# Altium PCB 摇杆总图.PcbDoc (part 2 of 2)
Units mil, origin at the board's own origin, x right, y up, seen from the top; angles counter-clockwise.
Board outline 1476.43 x 1476.37 mil, 2 copper layers (Top Layer, Bottom Layer); 8 components, 0 nets, 44 pads, 36 vias.
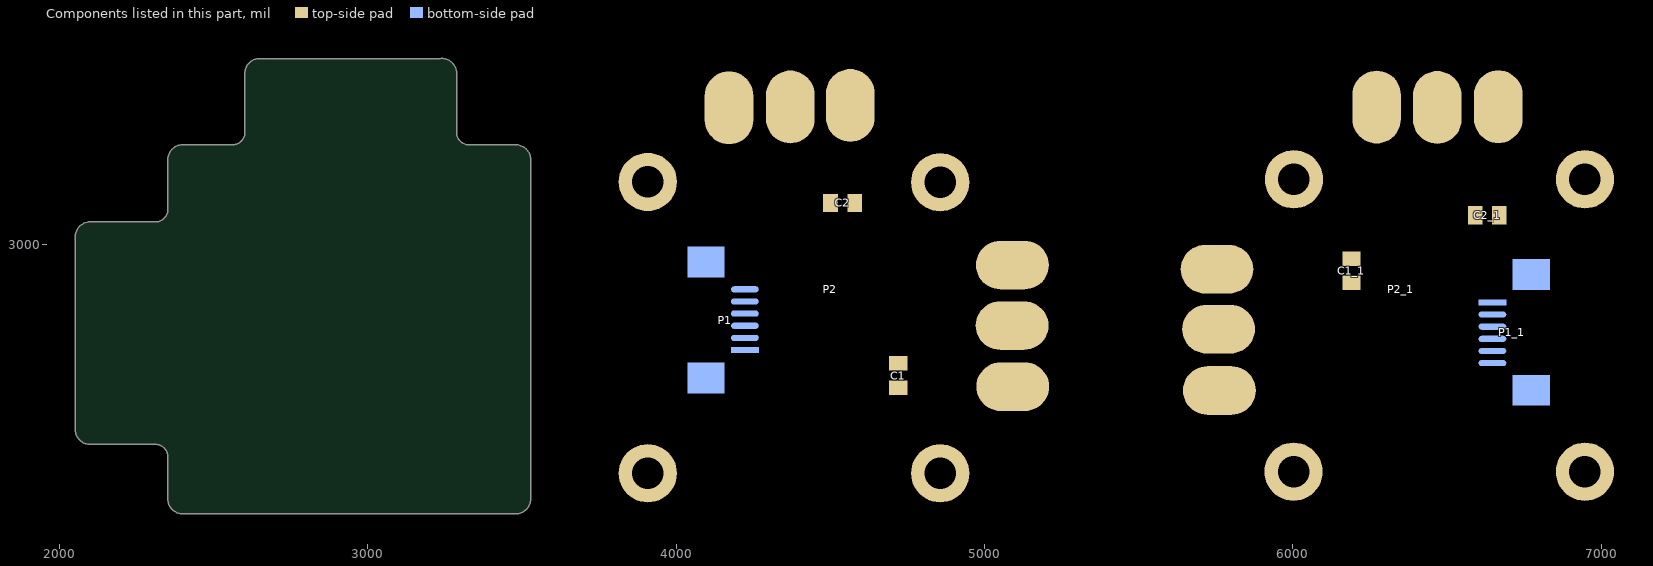
[diagram p2: the components of this part, seen from the top]

## Via types
v1: diameter 30, hole 20, Top Layer to Bottom Layer, 30 vias
v2: diameter 30, hole 20, Top Layer to Bottom Layer, tented both sides, 6 vias

## Nets (pads, with @x,y where several pads share a name; then routed paths per layer and width w, separated by ;. In a path a pad name is that pad's centre, name@x,y a point inside that pad or via, vN(x,y) a via of type N, cw(c..) or ccw(c..) an arc to the next point about the centre after c; other vN are vias at no path point) (continued)
copper on no net: | length 196716.6
  Top Layer w20: v1(4171.56,3146.56) v2(4171.56,3226.56) 4171.56,3443.23 ; 4309.29,3375.1 4405.03,3264.49 ; 4309.5,3374.68 4403.9,3268.74 ; 4309.6,3374.5 4404.85,3267.79 ; 4325.61,3387.34 4405.03,3264.49 ; 4325.7,3387.14 4403.9,3268.74 ; 4325.76,3386.98 4404.85,3267.79 ; 4343.24,3397.14 4404.42,3265.45 ; 4343.32,3396.92 4404.85,3267.79 ; 4343.28,3397.03 4403.9,3268.74 ; 4370.37,3445.98 4405,3411.36 v2(4405,3020) ; 4398.82,3410.7 4404.85,3267.79 ; 4419.01,3409.82 4403.9,3268.74 ; 4419,3409.93 4404.42,3265.45 ; 4418.99,3410.13 4404.85,3267.79 ; 4439.11,3406.19 4403.9,3268.74 ; 4439.11,3406.46 4404.42,3265.45 ; 4439.11,3406.67 4404.85,3267.79 ; 5089.67,2736.93 4631.93,2736.93 v2(4630,2735) ; 5759.02,2725.37 5829.39,2655 v2(6305,2655) 6230,2655 ; 5781.93,2658.63 5935.45,2656.18 ; 5782.02,2658.61 5939.45,2655.41 ; 5782.27,2658.55 5933.37,2657.47 ; 5782.82,2658.42 5937.6,2657.72 ; 5782.9,2658.4 5933.84,2658.78 ; 5783.03,2658.37 5933.65,2659.12 ; 5783.25,2658.32 5933.76,2659.58 ; 5783.6,2678.93 5935.45,2656.18 ; 5783.75,2678.88 5939.45,2655.41 ; 5783.79,2678.87 5933.37,2657.47 ; 5784.46,2678.67 5933.76,2659.58 ; 5785.84,2657.79 5942.04,2663.75 ; 5786.24,2657.72 5937.2,2665.53 ; 5786.39,2678.13 5942.04,2663.75 ; 5786.56,2678.09 5937.2,2665.53 ; 5786.68,2657.64 5934.41,2666.98 ; 5786.8,2678.03 5934.41,2666.98 ; 5787.15,2677.95 5934.62,2668.04 ; 5787.19,2657.55 5934.62,2668.04 ; 5787.39,2657.52 5942.22,2667.24 ; 5787.39,2677.89 5937.52,2668.13 ; 5787.44,2657.51 5937.52,2668.13 ; 5787.45,2677.88 5942.22,2667.24 ; 5787.6,2677.84 5937.5,2668.82 ; 5787.72,2677.82 5934.93,2669.77 ; 5787.74,2677.81 5934.89,2669.83 ; 5787.89,2698.62 5935.45,2656.18 ; 5787.97,2698.59 5933.37,2657.47 ; 5788.02,2657.42 5934.93,2669.77 ; 5788.02,2698.57 5939.45,2655.41 ; 5788.04,2657.42 5934.89,2669.83 ; 5788.22,2698.49 5933.84,2658.78 ; 5788.24,2677.7 5935.19,2671.34 ; 5788.26,2698.48 5933.65,2659.12 ; 5788.37,2677.67 5943.85,2669.92 ; 5788.35,2698.44 5933.76,2659.58 ; 5788.44,2657.36 5938.55,2670.13 ; 5788.48,2677.65 5935.11,2672.09 ; 5788.6,2657.33 5934.9,2671.02 ; 5788.65,2677.62 5945.22,2670.57 ; 5788.69,2657.32 5943.85,2669.92 ; 5788.77,2657.31 5935.19,2671.34 ; 5788.76,2677.59 5939.39,2672.11 ; 5788.85,2677.58 5940.13,2672.24 ; 5789.06,2657.27 5945.22,2670.57 ; 5789.12,2657.26 5935.11,2672.09 ; 5789.4,2657.22 5939.39,2672.11 ; 5789.5,2657.21 5940.13,2672.24 ; 5789.57,2698.02 5937.2,2665.53 ; 5789.53,2698.03 5942.04,2663.75 ; 5789.87,2697.93 5934.62,2668.04 ; 5790.04,2697.87 5937.52,2668.13 ; 5790.2,2697.82 5934.89,2669.83 ; 5790.19,2697.83 5934.93,2669.77 ; 5790.49,2697.74 5935.19,2671.34 ; 5790.62,2697.7 5935.11,2672.09 ; 5790.67,2697.69 5943.85,2669.92 ; 5790.9,2697.63 5940.13,2672.24 ; 5810.86,2751.27 5945.22,2670.57 ; 5810.98,2751.21 5940.13,2672.24 ; 5811.03,2751.18 5950.78,2666.72 ; 5811.39,2751 5935.11,2672.09 ; 5811.43,2750.99 5938.55,2670.13 ; 5811.5,2750.95 5935.19,2671.34 ; 5811.71,2750.84 5937.5,2668.82 ; 5812.06,2750.65 5934.62,2668.04 ; 5812.1,2750.63 5942.04,2663.75 ; 5822.32,2767.83 5945.22,2670.57 ; 5822.48,2767.74 5950.78,2666.72 ; 5822.62,2767.66 5940.13,2672.24 ; 5822.66,2767.64 5943.85,2669.92 ; 5823.36,2767.23 5938.55,2670.13 ; 5823.52,2767.13 5942.22,2667.24 ; 5823.68,2767.04 5934.9,2671.02 ; 5823.83,2766.95 5937.5,2668.82 ; 5823.97,2766.86 5934.89,2669.83 ; 5824.35,2766.62 5942.04,2663.75 ; 5824.44,2766.57 5934.62,2668.04 ; 5824.65,2766.44 5937.2,2665.53 ; 5824.73,2766.38 5934.62,2666.8 ; 5826.43,2765.24 5935.81,2658.51 ; 5826.51,2765.18 5933.76,2659.58 ; 5826.54,2765.16 5939.45,2655.41 ; 5826.67,2765.07 5933.84,2658.78 ; 5826.63,2765.1 5933.65,2659.12 ; 5826.98,2764.85 5935.45,2656.18 ; 5827.03,2764.81 5933.37,2657.47 ; 5835.96,2782.94 5945.22,2670.57 ; 5836.03,2782.89 5950.78,2666.72 ; 5836.45,2782.62 5943.85,2669.92 ; 5836.5,2782.58 5940.13,2672.24 ; 5836.7,2782.45 5939.39,2672.11 ; 5837.52,2781.89 5938.55,2670.13 ; 5837.62,2781.82 5942.22,2667.24 ; 5837.65,2781.79 5935.11,2672.09 ; 5837.88,2781.64 5935.19,2671.34 ; 5838.05,2781.52 5934.9,2671.02 ; 5838.16,2781.44 5937.5,2668.82 ; 5838.37,2781.29 5937.52,2668.13 ; 5838.71,2781.04 5942.04,2663.75 ; 5839.05,2780.8 5934.62,2668.04 ; 5839.24,2780.66 5937.2,2665.53 ; 5841.41,2778.98 5937.6,2657.72 ; 5841.59,2778.84 5935.81,2658.51 ; 5841.63,2778.8 5939.45,2655.41 ; 5841.76,2778.7 5933.76,2659.58 ; 5841.91,2778.58 5933.65,2659.12 ; 5841.96,2778.54 5933.84,2658.78 ; 5842.32,2778.24 5935.45,2656.18 ; 5842.44,2778.14 5933.37,2657.47 ; v2(6468.07,2943.07) 6468.07,3444.67 ; 4104.96,3386.83 4171.56,3265.12 ; 4104.96,3386.83 4171.56,3265.12 ; 4104.96,3386.83 4171.56,3265.12 ; 4104.96,3386.83 4171.56,3265.12 ; 4104.96,3386.83 4171.56,3265.12 ; 4104.96,3386.83 4171.56,3265.12 ; 4104.96,3386.83 4171.56,3265.12 ; 4104.96,3386.83 4171.56,3265.12 ; 4104.96,3386.83 4171.56,3265.12 ; 4123.57,3395.3 4171.56,3265.12 ; 4123.57,3395.3 4171.56,3265.12 ; 4123.57,3395.3 4171.56,3265.12 ; 4123.57,3395.3 4171.56,3265.12 ; 4123.57,3395.3 4171.56,3265.12 ; 4123.57,3395.3 4171.56,3265.12 ; 4123.57,3395.3 4171.56,3265.12 ; 4123.57,3395.3 4171.56,3265.12 ; 4123.57,3395.3 4171.56,3265.12 ; 4142.97,3400.88 4171.56,3265.12 ; 4142.97,3400.88 4171.56,3265.12 ; 4142.97,3400.88 4171.56,3265.12 ; 4142.97,3400.88 4171.56,3265.12 ; 4142.97,3400.88 4171.56,3265.12 ; 4142.97,3400.88 4171.56,3265.12 ; 4142.97,3400.88 4171.56,3265.12 ; 4142.97,3400.88 4171.56,3265.12 ; 4142.97,3400.88 4171.56,3265.12 ; 4171.56,3265.12 4171.56,3403.86 ; 4171.56,3265.12 4200.14,3400.88 ; 4171.56,3265.12 4219.54,3395.3 ; 4171.56,3265.12 4238.15,3386.83 ; 4171.56,3265.12 4238.15,3386.83 ; 4171.56,3265.12 4219.54,3395.3 ; 4171.56,3265.12 4200.14,3400.88 ; 4171.56,3265.12 4171.56,3403.86 ; 4171.56,3265.12 4238.15,3386.83 ; 4171.56,3265.12 4219.54,3395.3 ; 4171.56,3265.12 4200.14,3400.88 ; 4171.56,3265.12 4171.56,3403.86 ; 4171.56,3265.12 4238.15,3386.83 ; 4171.56,3265.12 4219.54,3395.3 ; 4171.56,3265.12 4200.14,3400.88 ; 4171.56,3265.12 4171.56,3403.86 ; 4171.56,3265.12 4238.15,3386.83 ; 4171.56,3265.12 4219.54,3395.3 ; 4171.56,3265.12 4200.14,3400.88 ; 4171.56,3265.12 4171.56,3403.86 ; 4171.56,3265.12 4238.15,3386.83 ; 4171.56,3265.12 4219.54,3395.3 ; 4171.56,3265.12 4200.14,3400.88 ; 4171.56,3265.12 4171.56,3403.86 ; 4171.56,3265.12 4238.15,3386.83 ; 4171.56,3265.12 4219.54,3395.3 ; 4171.56,3265.12 4200.14,3400.88 ; 4171.56,3265.12 4171.56,3403.86 ; 4171.56,3265.12 4238.15,3386.83 ; 4171.56,3265.12 4219.54,3395.3 ; 4171.56,3265.12 4200.14,3400.88 ; 4171.56,3265.12 4171.56,3403.86 ; 4171.56,3265.12 4238.15,3386.83 ; 4171.56,3265.12 4219.54,3395.3 ; 4171.56,3265.12 4200.14,3400.88 ; 4171.56,3265.12 4171.56,3403.86 ; 4309.25,3375.16 4405,3264.2 ; 4309.25,3375.16 4405,3264.2 ; 4309.25,3375.16 4405,3264.2 ; 4309.26,3375.14 4404.42,3265.45 ; 4309.25,3375.16 4405,3264.2 ; 4309.25,3375.16 4405,3264.2 ; 4325.59,3387.38 4405,3264.2 ; 4325.59,3387.38 4405,3264.2 ; 4325.59,3387.38 4405,3264.2 ; 4325.58,3387.4 4404.42,3265.45 ; 4325.59,3387.38 4405,3264.2 ; 4325.59,3387.38 4405,3264.2 ; 4343.25,3397.12 4405,3264.2 ; 4343.25,3397.12 4405,3264.2 ; 4343.26,3397.1 4405.03,3264.49 ; 4343.25,3397.12 4405,3264.2 ; 4343.25,3397.12 4405,3264.2 ; 4343.25,3397.12 4405,3264.2 ; 4370.37,3406.61 4405,3264.2 ; 4370.37,3406.61 4403.9,3268.74 ; 4370.37,3406.61 4404.85,3267.79 ; 4370.37,3406.61 4405,3264.2 ; 4370.37,3406.61 4405.03,3264.49 ; 4370.37,3406.61 4405,3264.2 ; 4370.37,3406.61 4404.42,3265.45 ; 4370.37,3406.61 4405,3264.2 ; 4370.37,3406.61 4405,3264.2 ; 4398.83,3410.63 4405,3264.2 ; 4398.83,3410.63 4405,3264.2 ; 4398.83,3410.65 4405.03,3264.49 ; 4398.83,3410.63 4405,3264.2 ; 4398.83,3410.63 4405,3264.2 ; 4398.83,3410.63 4405,3264.2 ; 4403.9,3268.74 4398.84,3410.54 4404.42,3265.45 ; 4405,3264.2 4418.99,3410.09 ; 4405,3264.2 4439.11,3406.74 ; 4405,3264.2 4439.11,3406.74 ; 4405,3264.2 4418.99,3410.09 ; 4405,3264.2 4439.11,3406.74 ; 4405,3264.2 4418.99,3410.09 ; 4405,3264.2 4439.11,3406.74 ; 4405,3264.2 4418.99,3410.09 ; 4405,3264.2 4439.11,3406.74 ; 4405,3264.2 4418.99,3410.09 ; 4405.03,3264.49 4439.11,3406.75 ; 4405.03,3264.49 4418.99,3410.11 ; v2(4630,2735) 4705.13,2736.93 v2(4630,2735) ; 4911.56,2736.93 5050.3,2736.93 ; 4911.56,2736.93 5047.32,2765.51 ; 4911.56,2736.93 5047.32,2708.34 ; 4911.56,2736.93 5041.73,2784.91 ; 4911.56,2736.93 5041.73,2688.95 ; 4911.56,2736.93 5033.27,2803.53 ; 4911.56,2736.93 5033.27,2670.33 ; 4911.56,2736.93 5033.27,2670.33 ; 4911.56,2736.93 5033.27,2803.53 ; 4911.56,2736.93 5041.73,2688.95 ; 4911.56,2736.93 5041.73,2784.91 ; 4911.56,2736.93 5047.32,2708.34 ; 4911.56,2736.93 5047.32,2765.51 ; 4911.56,2736.93 5050.3,2736.93 ; 4911.56,2736.93 5033.27,2670.33 ; 4911.56,2736.93 5033.27,2803.53 ; 4911.56,2736.93 5041.73,2688.95 ; 4911.56,2736.93 5041.73,2784.91 ; 4911.56,2736.93 5047.32,2708.34 ; 4911.56,2736.93 5047.32,2765.51 ; 4911.56,2736.93 5050.3,2736.93 ; 4911.56,2736.93 5033.27,2670.33 ; 4911.56,2736.93 5033.27,2803.53 ; 4911.56,2736.93 5041.73,2688.95 ; 4911.56,2736.93 5041.73,2784.91 ; 4911.56,2736.93 5047.32,2708.34 ; 4911.56,2736.93 5047.32,2765.51 ; 4911.56,2736.93 5050.3,2736.93 ; 4911.56,2736.93 5033.27,2670.33 ; 4911.56,2736.93 5033.27,2803.53 ; 4911.56,2736.93 5041.73,2688.95 ; 4911.56,2736.93 5041.73,2784.91 ; 4911.56,2736.93 5047.32,2708.34 ; 4911.56,2736.93 5047.32,2765.51 ; 4911.56,2736.93 5050.3,2736.93 ; 4911.56,2736.93 5033.27,2670.33 ; 4911.56,2736.93 5033.27,2803.53 ; 4911.56,2736.93 5041.73,2688.95 ; 4911.56,2736.93 5041.73,2784.91 ; 4911.56,2736.93 5047.32,2708.34 ; 4911.56,2736.93 5047.32,2765.51 ; 4911.56,2736.93 5050.3,2736.93 ; 4911.56,2736.93 5033.27,2670.33 ; 4911.56,2736.93 5033.27,2803.53 ; 4911.56,2736.93 5041.73,2688.95 ; 4911.56,2736.93 5041.73,2784.91 ; 4911.56,2736.93 5047.32,2708.34 ; 4911.56,2736.93 5047.32,2765.51 ; 4911.56,2736.93 5050.3,2736.93 ; 4911.56,2736.93 5033.27,2670.33 ; 4911.56,2736.93 5033.27,2803.53 ; 4911.56,2736.93 5041.73,2688.95 ; 4911.56,2736.93 5041.73,2784.91 ; 4911.56,2736.93 5047.32,2708.34 ; 4911.56,2736.93 5047.32,2765.51 ; 4911.56,2736.93 5050.3,2736.93 ; 4911.56,2736.93 5033.27,2670.33 ; 4911.56,2736.93 5033.27,2803.53 ; 4911.56,2736.93 5041.73,2688.95 ; 4911.56,2736.93 5041.73,2784.91 ; 4911.56,2736.93 5047.32,2708.34 ; 4911.56,2736.93 5047.32,2765.51 ; 4911.56,2736.93 5050.3,2736.93 ; 5782.14,2658.58 5940.75,2655.38 ; 5782.14,2658.58 5940.75,2655.38 ; 5782.14,2658.58 5940.75,2655.38 ; 5782.14,2658.58 5940.75,2655.38 ; 5782.14,2658.58 5940.75,2655.38 ; 5782.99,2658.38 5936.02,2658.48 ; 5782.99,2658.38 5936.02,2658.48 ; 5782.99,2658.38 5936.02,2658.48 ; 5782.99,2658.38 5936.02,2658.48 ; 5782.98,2658.38 5935.81,2658.51 ; 5782.99,2658.38 5936.02,2658.48 ; 5782.99,2658.38 5936.02,2658.48 ; 5782.99,2658.38 5936.02,2658.48 ; 5783.86,2678.85 5940.75,2655.38 ; 5783.86,2678.85 5940.75,2655.38 ; 5783.86,2678.85 5940.75,2655.38 ; 5783.86,2678.85 5940.75,2655.38 ; 5783.86,2678.85 5940.75,2655.38 ; 5783.95,2658.17 5962.33,2655 ; 5783.95,2658.17 5962.33,2655 ; 5783.95,2658.17 5962.33,2655 ; 5784.33,2678.7 5936.02,2658.48 ; 5784.33,2678.7 5936.02,2658.48 ; 5784.33,2678.7 5936.02,2658.48 ; 5784.33,2678.7 5936.02,2658.48 ; 5784.33,2678.7 5936.02,2658.48 ; 5784.33,2678.7 5936.02,2658.48 ; 5784.33,2678.7 5936.02,2658.48 ; 5784.39,2658.07 5933.76,2662.12 ; 5784.39,2658.07 5933.76,2662.12 ; 5784.39,2658.07 5933.76,2662.12 ; 5784.39,2658.07 5933.76,2662.12 ; 5784.39,2658.07 5933.76,2662.12 ; 5784.39,2658.07 5933.76,2662.12 ; 5784.39,2658.07 5933.76,2662.12 ; 5784.39,2658.07 5933.76,2662.12 ; 5784.39,2658.07 5933.76,2662.12 ; 5784.39,2658.07 5933.76,2662.12 ; 5785.23,2678.44 5933.76,2662.12 ; 5785.23,2678.44 5933.76,2662.12 ; 5785.23,2678.44 5933.76,2662.12 ; 5785.23,2678.44 5933.76,2662.12 ; 5785.23,2678.44 5933.76,2662.12 ; 5785.23,2678.44 5933.76,2662.12 ; 5785.23,2678.44 5933.76,2662.12 ; 5785.23,2678.44 5933.76,2662.12 ; 5785.23,2678.44 5933.76,2662.12 ; 5785.23,2678.44 5933.76,2662.12 ; 5785.46,2678.38 5962.33,2655 ; 5785.46,2678.38 5962.33,2655 ; 5785.46,2678.38 5962.33,2655 ; 5786.6,2657.65 5935.05,2666.71 ; 5786.6,2657.65 5935.05,2666.71 ; 5786.6,2657.65 5935.05,2666.71 ; 5786.6,2657.65 5935.05,2666.71 ; 5786.6,2657.65 5935.05,2666.71 ; 5786.6,2657.65 5935.05,2666.71 ; 5786.6,2657.65 5935.05,2666.71 ; 5786.61,2657.65 5934.62,2666.8 ; 5786.6,2657.65 5935.05,2666.71 ; 5786.76,2678.04 5935.05,2666.71 ; 5786.76,2678.04 5935.05,2666.71 ; 5786.76,2678.04 5935.05,2666.71 ; 5786.76,2678.04 5935.05,2666.71 ; 5786.76,2678.04 5935.05,2666.71 ; 5786.76,2678.04 5935.05,2666.71 ; 5786.76,2678.04 5935.05,2666.71 ; 5786.76,2678.04 5934.62,2666.8 ; 5786.76,2678.04 5935.05,2666.71 ; 5786.87,2657.61 5953.28,2664.2 ; 5786.87,2657.61 5953.28,2664.2 ; 5786.87,2657.61 5953.28,2664.2 ; 5787.31,2677.91 5953.28,2664.2 ; 5787.31,2677.91 5953.28,2664.2 ; 5787.31,2677.91 5953.28,2664.2 ; 5787.78,2677.8 5940.94,2668.61 ; 5787.78,2677.8 5940.94,2668.61 ; 5787.78,2677.8 5940.94,2668.61 ; 5787.78,2677.8 5940.94,2668.61 ; 5787.78,2677.8 5940.94,2668.61 ; 5787.78,2677.8 5940.94,2668.61 ; 5787.83,2657.45 5946.82,2667.53 ; 5787.83,2657.45 5946.82,2667.53 ; 5787.83,2657.45 5946.82,2667.53 ; 5787.83,2657.45 5946.82,2667.53 ; 5787.84,2677.79 5946.82,2667.53 ; 5787.84,2677.79 5946.82,2667.53 ; 5787.86,2677.78 5950.78,2666.72 ; 5787.84,2677.79 5946.82,2667.53 ; 5787.84,2677.79 5946.82,2667.53 ; 5787.91,2657.44 5940.94,2668.61 ; 5787.91,2657.44 5940.94,2668.61 ; 5787.91,2657.44 5940.94,2668.61 ; 5787.91,2657.44 5940.94,2668.61 ; 5787.91,2657.44 5940.94,2668.61 ; 5787.91,2657.44 5940.94,2668.61 ; 5788.09,2698.54 5940.75,2655.38 ; 5788.09,2698.54 5940.75,2655.38 ; 5788.09,2698.54 5940.75,2655.38 ; 5788.09,2698.54 5940.75,2655.38 ; 5788.09,2698.54 5940.75,2655.38 ; 5788.28,2698.47 5937.6,2657.72 ; 5788.31,2698.46 5936.02,2658.48 ; 5788.31,2698.46 5936.02,2658.48 ; 5788.31,2698.46 5936.02,2658.48 ; 5788.31,2698.46 5936.02,2658.48 ; 5788.3,2698.46 5935.81,2658.51 ; 5788.31,2698.46 5936.02,2658.48 ; 5788.31,2698.46 5936.02,2658.48 ; 5788.31,2698.46 5936.02,2658.48 ; 5788.78,2698.29 5933.76,2662.12 ; 5788.78,2698.29 5933.76,2662.12 ; 5788.78,2698.29 5933.76,2662.12 ; 5788.78,2698.29 5933.76,2662.12 ; 5788.78,2698.29 5933.76,2662.12 ; 5788.78,2698.29 5933.76,2662.12 ; 5788.78,2698.29 5933.76,2662.12 ; 5788.78,2698.29 5933.76,2662.12 ; 5788.78,2698.29 5933.76,2662.12 ; 5788.78,2698.29 5933.76,2662.12 ; 5789.21,2698.14 5962.33,2655 ; 5789.21,2698.14 5962.33,2655 ; 5789.21,2698.14 5962.33,2655 ; 5789.65,2697.99 5935.05,2666.71 ; 5789.65,2697.99 5935.05,2666.71 ; 5789.65,2697.99 5935.05,2666.71 ; 5789.65,2697.99 5935.05,2666.71 ; 5789.67,2697.99 5934.41,2666.98 ; 5789.65,2697.99 5935.05,2666.71 ; 5789.65,2697.99 5935.05,2666.71 ; 5789.65,2697.99 5935.05,2666.71 ; 5789.65,2697.99 5934.62,2666.8 ; 5789.65,2697.99 5935.05,2666.71 ; 5790.17,2697.83 5953.28,2664.2 ; 5790.17,2697.83 5953.28,2664.2 ; 5790.16,2697.84 5937.5,2668.82 ; 5790.13,2697.85 5942.22,2667.24 ; 5790.17,2697.83 5953.28,2664.2 ; 5790.3,2697.79 5940.94,2668.61 ; 5790.3,2697.79 5940.94,2668.61 ; 5790.3,2697.79 5940.94,2668.61 ; 5790.3,2697.79 5940.94,2668.61 ; 5790.3,2697.79 5940.94,2668.61 ; 5790.3,2697.79 5940.94,2668.61 ; 5790.41,2697.76 5946.82,2667.53 ; 5790.42,2697.76 5934.9,2671.02 ; 5790.41,2697.76 5946.82,2667.53 ; 5790.41,2697.76 5946.82,2667.53 ; 5790.41,2697.76 5946.82,2667.53 ; 5798.39,2725.37 5962.33,2655 ; 5798.39,2725.37 5935.05,2666.71 ; 5798.39,2725.37 5940.94,2668.61 ; 5798.39,2725.37 5946.82,2667.53 ; 5798.39,2725.37 5953.28,2664.2 ; 5798.39,2725.37 5940.75,2655.38 ; 5798.39,2725.37 5940.75,2655.38 ; 5798.39,2725.37 5937.6,2657.72 ; 5798.39,2725.37 5933.84,2658.78 ; 5798.39,2725.37 5933.76,2662.12 ; 5798.39,2725.37 5933.76,2662.12 ; 5798.39,2725.37 5933.76,2662.12 ; 5798.39,2725.37 5933.76,2662.12 ; 5798.39,2725.37 5936.02,2658.48 ; 5798.39,2725.37 5936.02,2658.48 ; 5798.39,2725.37 5936.02,2658.48 ; 5798.39,2725.37 5933.76,2659.58 ; 5798.39,2725.37 5935.05,2666.71 ; 5798.39,2725.37 5935.05,2666.71 ; 5798.39,2725.37 5935.05,2666.71 ; 5798.39,2725.37 5934.41,2666.98 ; 5798.39,2725.37 5940.94,2668.61 ; 5798.39,2725.37 5940.94,2668.61 ; 5798.39,2725.37 5938.55,2670.13 ; 5798.39,2725.37 5934.9,2671.02 ; 5798.39,2725.37 5946.82,2667.53 ; 5798.39,2725.37 5943.85,2669.92 ; 5798.39,2725.37 5939.39,2672.11 ; 5798.39,2725.37 5935.11,2672.09 ; 5798.39,2725.37 5950.78,2666.72 ; 5798.39,2725.37 5945.22,2670.57 ; 5798.39,2725.37 5940.13,2672.24 ; 5798.39,2725.37 5935.19,2671.34 ; 5798.39,2725.37 5953.28,2664.2 ; 5798.39,2725.37 5946.82,2667.53 ; 5798.39,2725.37 5940.94,2668.61 ; 5798.39,2725.37 5935.05,2666.71 ; 5798.39,2725.37 5933.76,2662.12 ; 5798.39,2725.37 5936.02,2658.48 ; 5798.39,2725.37 5935.45,2656.18 ; 5798.39,2725.37 5933.37,2657.47 ; 5798.39,2725.37 5933.76,2662.12 ; 5798.39,2725.37 5933.76,2662.12 ; 5798.39,2725.37 5935.81,2658.51 ; 5798.39,2725.37 5933.65,2659.12 ; 5798.39,2725.37 5935.05,2666.71 ; 5798.39,2725.37 5935.05,2666.71 ; 5798.39,2725.37 5934.62,2666.8 ; 5798.39,2725.37 5940.94,2668.61 ; 5798.39,2725.37 5937.5,2668.82 ; 5798.39,2725.37 5934.93,2669.77 ; 5798.39,2725.37 5942.22,2667.24 ; 5798.39,2725.37 5937.52,2668.13 ; 5798.39,2725.37 5934.89,2669.83 ; 5798.39,2725.37 5937.2,2665.53 ; 5798.39,2725.37 5934.62,2668.04 ; 5798.39,2725.37 5936.02,2658.48 ; 5798.39,2725.37 5933.76,2662.12 ; 5798.39,2725.37 5940.75,2655.38 ; 5798.39,2725.37 5939.45,2655.41 ; 5798.39,2725.37 5933.76,2662.12 ; 5798.39,2725.37 5936.02,2658.48 ; 5798.39,2725.37 5942.04,2663.75 ; 5798.39,2725.37 5940.75,2655.38 ; 5798.39,2725.37 5962.33,2655 ; 5798.39,2725.37 5940.75,2655.38 ; 5798.39,2725.37 5933.76,2662.12 ; 5798.39,2725.37 5936.02,2658.48 ; 5798.39,2725.37 5935.05,2666.71 ; 5798.39,2725.37 5940.94,2668.61 ; 5798.39,2725.37 5946.82,2667.53 ; 5798.39,2725.37 5953.28,2664.2 ; 5798.39,2725.37 5962.33,2655 ; 5811.19,2751.1 5946.82,2667.53 ; 5811.21,2751.09 5953.28,2664.2 ; 5811.19,2751.1 5946.82,2667.53 ; 5811.21,2751.09 5953.28,2664.2 ; 5811.19,2751.1 5946.82,2667.53 ; 5811.19,2751.1 5946.82,2667.53 ; 5811.21,2751.09 5953.28,2664.2 ; 5811.47,2750.96 5940.94,2668.61 ; 5811.47,2750.96 5940.94,2668.61 ; 5811.47,2750.96 5940.94,2668.61 ; 5811.47,2750.96 5940.94,2668.61 ; 5811.47,2750.96 5940.94,2668.61 ; 5811.47,2750.96 5940.94,2668.61 ; 5811.81,2750.78 5962.33,2655 ; 5811.81,2750.79 5937.52,2668.13 ; 5811.81,2750.78 5962.33,2655 ; 5811.81,2750.78 5962.33,2655 ; 5812.22,2750.56 5935.05,2666.71 ; 5812.22,2750.56 5935.05,2666.71 ; 5812.22,2750.56 5935.05,2666.71 ; 5812.22,2750.56 5935.05,2666.71 ; 5812.22,2750.56 5935.05,2666.71 ; 5812.22,2750.56 5935.05,2666.71 ; 5812.22,2750.56 5935.05,2666.71 ; 5812.22,2750.56 5937.2,2665.53 ; 5812.22,2750.56 5935.05,2666.71 ; 5813,2750.12 5933.76,2662.12 ; 5813,2750.12 5933.76,2662.12 ; 5813,2750.12 5933.76,2662.12 ; 5813,2750.12 5933.76,2662.12 ; 5813,2750.12 5933.76,2662.12 ; 5813,2750.12 5933.76,2662.12 ; 5813,2750.12 5933.76,2662.12 ; 5813,2750.12 5933.76,2662.12 ; 5813,2750.12 5933.76,2662.12 ; 5813,2750.12 5933.76,2662.12 ; 5813.29,2749.95 5937.6,2657.72 ; 5813.32,2749.93 5936.02,2658.48 ; 5813.32,2749.93 5936.02,2658.48 ; 5813.32,2749.93 5936.02,2658.48 ; 5813.32,2749.93 5936.02,2658.48 ; 5813.32,2749.93 5936.02,2658.48 ; 5813.32,2749.93 5936.02,2658.48 ; 5813.32,2749.93 5936.02,2658.48 ; 5813.35,2749.91 5940.75,2655.38 ; 5813.35,2749.91 5940.75,2655.38 ; 5813.36,2749.91 5933.76,2659.58 ; 5813.34,2749.92 5935.81,2658.51 ; 5813.35,2749.91 5940.75,2655.38 ; 5813.35,2749.91 5940.75,2655.38 ; 5813.35,2749.91 5940.75,2655.38 ; 5813.46,2749.84 5933.84,2658.78 ; 5813.43,2749.86 5933.65,2659.12 ; 5813.45,2749.85 5939.45,2655.41 ; 5822.73,2767.6 5953.28,2664.2 ; 5822.76,2767.58 5939.39,2672.11 ; 5822.73,2767.6 5953.28,2664.2 ; 5822.73,2767.6 5953.28,2664.2 ; 5822.82,2767.55 5946.82,2667.53 ; 5822.82,2767.55 5946.82,2667.53 ; 5822.82,2767.55 5946.82,2667.53 ; 5822.82,2767.55 5946.82,2667.53 ; 5823.38,2767.22 5940.94,2668.61 ; 5823.38,2767.22 5940.94,2668.61 ; 5823.38,2767.22 5940.94,2668.61 ; 5823.38,2767.22 5935.11,2672.09 ; 5823.38,2767.22 5940.94,2668.61 ; 5823.38,2767.22 5940.94,2668.61 ; 5823.38,2767.22 5940.94,2668.61 ; 5823.55,2767.12 5962.33,2655 ; 5823.55,2767.11 5935.19,2671.34 ; 5823.55,2767.12 5962.33,2655 ; 5823.55,2767.12 5962.33,2655 ; 5824.69,2766.41 5935.05,2666.71 ; 5824.69,2766.41 5935.05,2666.71 ; 5824.69,2766.41 5935.05,2666.71 ; 5824.69,2766.41 5935.05,2666.71 ; 5824.72,2766.39 5934.41,2666.98 ; 5824.69,2766.41 5935.05,2666.71 ; 5824.69,2766.41 5935.05,2666.71 ; 5824.69,2766.41 5935.05,2666.71 ; 5824.69,2766.41 5935.05,2666.71 ; 5825.94,2765.57 5933.76,2662.12 ; 5825.94,2765.57 5933.76,2662.12 ; 5825.94,2765.57 5933.76,2662.12 ; 5825.94,2765.57 5933.76,2662.12 ; 5825.94,2765.57 5933.76,2662.12 ; 5825.94,2765.57 5933.76,2662.12 ; 5825.94,2765.57 5933.76,2662.12 ; 5825.94,2765.57 5933.76,2662.12 ; 5825.94,2765.57 5933.76,2662.12 ; 5825.94,2765.57 5933.76,2662.12 ; 5826.35,2765.29 5940.75,2655.38 ; 5826.35,2765.29 5940.75,2655.38 ; 5826.33,2765.31 5937.6,2657.72 ; 5826.35,2765.29 5940.75,2655.38 ; 5826.35,2765.29 5940.75,2655.38 ; 5826.35,2765.29 5940.75,2655.38 ; 5826.4,2765.26 5936.02,2658.48 ; 5826.4,2765.26 5936.02,2658.48 ; 5826.4,2765.26 5936.02,2658.48 ; 5826.4,2765.26 5936.02,2658.48 ; 5826.4,2765.26 5936.02,2658.48 ; 5826.4,2765.26 5936.02,2658.48 ; 5826.4,2765.26 5936.02,2658.48 ; 5836.29,2782.72 5953.28,2664.2 ; 5836.29,2782.72 5953.28,2664.2 ; 5836.29,2782.72 5953.28,2664.2 ; 5836.58,2782.53 5946.82,2667.53 ; 5836.58,2782.53 5946.82,2667.53 ; 5836.58,2782.53 5946.82,2667.53 ; 5836.58,2782.53 5946.82,2667.53 ; 5837.16,2782.13 5962.33,2655 ; 5837.16,2782.13 5962.33,2655 ; 5837.16,2782.13 5962.33,2655 ; 5837.47,2781.92 5940.94,2668.61 ; 5837.47,2781.92 5940.94,2668.61 ; 5837.47,2781.92 5940.94,2668.61 ; 5837.47,2781.92 5940.94,2668.61 ; 5837.47,2781.92 5940.94,2668.61 ; 5837.47,2781.92 5940.94,2668.61 ; 5839.36,2780.56 5935.05,2666.71 ; 5839.36,2780.56 5935.05,2666.71 ; 5839.36,2780.56 5935.05,2666.71 ; 5839.36,2780.56 5935.05,2666.71 ; 5839.36,2780.56 5935.05,2666.71 ; 5839.36,2780.56 5935.05,2666.71 ; 5839.36,2780.56 5935.05,2666.71 ; 5839.36,2780.56 5935.05,2666.71 ; 5841.03,2779.29 5933.76,2662.12 ; 5841.03,2779.29 5933.76,2662.12 ; 5841.03,2779.29 5933.76,2662.12 ; 5841.03,2779.29 5933.76,2662.12 ; 5841.03,2779.29 5933.76,2662.12 ; 5841.03,2779.29 5933.76,2662.12 ; 5841.03,2779.29 5933.76,2662.12 ; 5841.03,2779.29 5933.76,2662.12 ; 5841.03,2779.29 5933.76,2662.12 ; 5841.03,2779.29 5933.76,2662.12 ; 5841.36,2779.03 5940.75,2655.38 ; 5841.36,2779.03 5940.75,2655.38 ; 5841.36,2779.03 5940.75,2655.38 ; 5841.36,2779.03 5940.75,2655.38 ; 5841.36,2779.03 5940.75,2655.38 ; 5841.55,2778.87 5936.02,2658.48 ; 5841.55,2778.87 5936.02,2658.48 ; 5841.55,2778.87 5936.02,2658.48 ; 5841.55,2778.87 5936.02,2658.48 ; 5841.55,2778.87 5936.02,2658.48 ; 5841.55,2778.87 5936.02,2658.48 ; 5841.55,2778.87 5936.02,2658.48 ; 5933.37,2657.47 5813.68,2749.7 5935.45,2656.18 ; 5933.65,2659.12 5784.31,2678.71 5935.81,2658.51 ; 5933.84,2658.78 5784.23,2678.74 5937.6,2657.72 ; 5934.41,2666.98 5812.23,2750.56 5934.62,2666.8 ; 5934.41,2666.98 5839.43,2780.52 5934.62,2666.8 ; 5934.89,2669.83 5811.76,2750.81 5934.93,2669.77 ; 5934.89,2669.83 5838.43,2781.25 5934.93,2669.77 ; 5934.9,2671.02 5811.58,2750.91 5942.22,2667.24 ; 5934.9,2671.02 5788.11,2677.73 5938.55,2670.13 ; 5934.93,2669.77 5823.98,2766.86 5937.52,2668.13 ; 5937.5,2668.82 5787.76,2657.46 5950.78,2666.72 ; 5938.55,2670.13 5790.45,2697.75 5950.78,2666.72 ; 5939.39,2672.11 5790.84,2697.64 5945.22,2670.57 ; 5939.39,2672.11 5811.06,2751.17 5943.85,2669.92 ; 6401.47,3388.27 6468.07,3266.56 ; 6401.47,3388.27 6468.07,3266.56 ; 6401.47,3388.27 6468.07,3266.56 ; 6401.47,3388.27 6468.07,3266.56 ; 6401.47,3388.27 6468.07,3266.56 ; 6401.47,3388.27 6468.07,3266.56 ; 6401.47,3388.27 6468.07,3266.56 ; 6401.47,3388.27 6468.07,3266.56 ; 6401.47,3388.27 6468.07,3266.56 ; 6401.47,3388.27 6468.07,3266.56 ; 6401.47,3388.27 6468.07,3266.56 ; 6401.47,3388.27 6468.07,3266.56 ; 6401.47,3388.27 6468.07,3266.56 ; 6401.47,3388.27 6468.07,3266.56 ; 6401.47,3388.27 6468.07,3266.56 ; 6401.47,3388.27 6468.07,3266.56 ; 6401.47,3388.27 6468.07,3266.56 ; 6401.47,3388.27 6468.07,3266.56 ; 6401.47,3388.27 6468.07,3266.56 ; 6401.47,3388.27 6468.07,3266.56 ; 6401.47,3388.27 6468.07,3266.56 ; 6401.47,3388.27 6468.07,3266.56 ; 6401.47,3388.27 6468.07,3266.56 ; 6401.47,3388.27 6468.07,3266.56 ; 6401.47,3388.27 6468.07,3266.56 ; 6401.47,3388.27 6468.07,3266.56 ; 6401.47,3388.27 6468.07,3266.56 ; 6401.47,3388.27 6468.07,3266.56 ; 6401.47,3388.27 6468.07,3266.56 ; 6401.47,3388.27 6468.07,3266.56 ; 6401.47,3388.27 6468.07,3266.56 ; 6401.47,3388.27 6468.07,3266.56 ; 6401.47,3388.27 6468.07,3266.56 ; 6401.47,3388.27 6468.07,3266.56 ; 6401.47,3388.27 6468.07,3266.56 ; 6401.47,3388.27 6468.07,3266.56 ; 6401.47,3388.27 6468.07,3266.56 ; 6401.47,3388.27 6468.07,3266.56 ; 6401.47,3388.27 6468.07,3266.56 ; 6401.47,3388.27 6468.07,3266.56 ; 6401.47,3388.27 6468.07,3266.56 ; 6401.47,3388.27 6468.07,3266.56 ; 6401.47,3388.27 6468.07,3266.56 ; 6401.47,3388.27 6468.07,3266.56 ; 6401.47,3388.27 6468.07,3266.56 ; 6401.47,3388.27 6468.07,3266.56 ; 6401.47,3388.27 6468.07,3266.56 ; 6401.47,3388.27 6468.07,3266.56 ; 6401.47,3388.27 6468.07,3266.56 ; 6401.47,3388.27 6468.07,3266.56 ; 6401.47,3388.27 6468.07,3266.56 ; 6401.47,3388.27 6468.07,3266.56 ; 6401.47,3388.27 6468.07,3266.56 ; 6401.47,3388.27 6468.07,3266.56 ; 6401.47,3388.27 6468.07,3266.56 ; 6401.47,3388.27 6468.07,3266.56 ; 6401.47,3388.27 6468.07,3266.56 ; 6401.47,3388.27 6468.07,3266.56 ; 6401.47,3388.27 6468.07,3266.56 ; 6401.47,3388.27 6468.07,3266.56 ; 6401.47,3388.27 6468.07,3266.56 ; 6401.47,3388.27 6468.07,3266.56 ; 6401.47,3388.27 6468.07,3266.56 ; 6401.47,3388.27 6468.07,3266.56 ; 6401.47,3388.27 6468.07,3266.56 ; 6401.47,3388.27 6468.07,3266.56 ; 6401.47,3388.27 6468.07,3266.56 ; 6401.47,3388.27 6468.07,3266.56 ; 6401.47,3388.27 6468.07,3266.56 ; 6401.47,3388.27 6468.07,3266.56 ; 6401.47,3388.27 6468.07,3266.56 ; 6401.47,3388.27 6468.07,3266.56 ; 6401.47,3388.27 6468.07,3266.56 ; 6420.09,3396.73 6468.07,3266.56 ; 6420.09,3396.73 6468.07,3266.56 ; 6420.09,3396.73 6468.07,3266.56 ; 6420.09,3396.73 6468.07,3266.56 ; 6420.09,3396.73 6468.07,3266.56 ; 6420.09,3396.73 6468.07,3266.56 ; 6420.09,3396.73 6468.07,3266.56 ; 6420.09,3396.73 6468.07,3266.56 ; 6420.09,3396.73 6468.07,3266.56 ; 6420.09,3396.73 6468.07,3266.56 ; 6420.09,3396.73 6468.07,3266.56 ; 6420.09,3396.73 6468.07,3266.56 ; 6420.09,3396.73 6468.07,3266.56 ; 6420.09,3396.73 6468.07,3266.56 ; 6420.09,3396.73 6468.07,3266.56 ; 6420.09,3396.73 6468.07,3266.56 ; 6420.09,3396.73 6468.07,3266.56 ; 6420.09,3396.73 6468.07,3266.56 ; 6420.09,3396.73 6468.07,3266.56 ; 6420.09,3396.73 6468.07,3266.56 ; 6420.09,3396.73 6468.07,3266.56 ; 6420.09,3396.73 6468.07,3266.56 ; 6420.09,3396.73 6468.07,3266.56 ; 6420.09,3396.73 6468.07,3266.56 ; 6420.09,3396.73 6468.07,3266.56 ; 6420.09,3396.73 6468.07,3266.56 ; 6420.09,3396.73 6468.07,3266.56 ; 6420.09,3396.73 6468.07,3266.56 ; 6420.09,3396.73 6468.07,3266.56 ; 6420.09,3396.73 6468.07,3266.56 ; 6420.09,3396.73 6468.07,3266.56 ; 6420.09,3396.73 6468.07,3266.56 ; 6420.09,3396.73 6468.07,3266.56 ; 6420.09,3396.73 6468.07,3266.56 ; 6420.09,3396.73 6468.07,3266.56 ; 6420.09,3396.73 6468.07,3266.56 ; 6420.09,3396.73 6468.07,3266.56 ; 6420.09,3396.73 6468.07,3266.56 ; 6420.09,3396.73 6468.07,3266.56 ; 6420.09,3396.73 6468.07,3266.56 ; 6420.09,3396.73 6468.07,3266.56 ; 6420.09,3396.73 6468.07,3266.56 ; 6420.09,3396.73 6468.07,3266.56 ; 6420.09,3396.73 6468.07,3266.56 ; 6420.09,3396.73 6468.07,3266.56 ; 6420.09,3396.73 6468.07,3266.56 ; 6420.09,3396.73 6468.07,3266.56 ; 6420.09,3396.73 6468.07,3266.56 ; 6420.09,3396.73 6468.07,3266.56 ; 6420.09,3396.73 6468.07,3266.56 ; 6420.09,3396.73 6468.07,3266.56 ; 6420.09,3396.73 6468.07,3266.56 ; 6420.09,3396.73 6468.07,3266.56 ; 6420.09,3396.73 6468.07,3266.56 ; 6420.09,3396.73 6468.07,3266.56 ; 6420.09,3396.73 6468.07,3266.56 ; 6420.09,3396.73 6468.07,3266.56 ; 6420.09,3396.73 6468.07,3266.56 ; 6420.09,3396.73 6468.07,3266.56 ; 6420.09,3396.73 6468.07,3266.56 ; 6420.09,3396.73 6468.07,3266.56 ; 6420.09,3396.73 6468.07,3266.56 ; 6420.09,3396.73 6468.07,3266.56 ; 6420.09,3396.73 6468.07,3266.56 ; 6420.09,3396.73 6468.07,3266.56 ; 6420.09,3396.73 6468.07,3266.56 ; 6420.09,3396.73 6468.07,3266.56 ; 6420.09,3396.73 6468.07,3266.56 ; 6420.09,3396.73 6468.07,3266.56 ; 6420.09,3396.73 6468.07,3266.56 ; 6420.09,3396.73 6468.07,3266.56 ; 6420.09,3396.73 6468.07,3266.56 ; 6420.09,3396.73 6468.07,3266.56 ; 6439.49,3402.32 6468.07,3266.56 ; 6439.49,3402.32 6468.07,3266.56 ; 6439.49,3402.32 6468.07,3266.56 ; 6439.49,3402.32 6468.07,3266.56 ; 6439.49,3402.32 6468.07,3266.56 ; 6439.49,3402.32 6468.07,3266.56 ; 6439.49,3402.32 6468.07,3266.56 ; 6439.49,3402.32 6468.07,3266.56 ; 6439.49,3402.32 6468.07,3266.56 ; 6439.49,3402.32 6468.07,3266.56 ; 6439.49,3402.32 6468.07,3266.56 ; 6439.49,3402.32 6468.07,3266.56 ; 6439.49,3402.32 6468.07,3266.56 ; 6439.49,3402.32 6468.07,3266.56 ; 6439.49,3402.32 6468.07,3266.56 ; 6439.49,3402.32 6468.07,3266.56 ; 6439.49,3402.32 6468.07,3266.56 ; 6439.49,3402.32 6468.07,3266.56 ; 6439.49,3402.32 6468.07,3266.56 ; 6439.49,3402.32 6468.07,3266.56 ; 6439.49,3402.32 6468.07,3266.56 ; 6439.49,3402.32 6468.07,3266.56 ; 6439.49,3402.32 6468.07,3266.56 ; 6439.49,3402.32 6468.07,3266.56 ; 6439.49,3402.32 6468.07,3266.56 ; 6439.49,3402.32 6468.07,3266.56 ; 6439.49,3402.32 6468.07,3266.56 ; 6439.49,3402.32 6468.07,3266.56 ; 6439.49,3402.32 6468.07,3266.56 ; 6439.49,3402.32 6468.07,3266.56 ; 6439.49,3402.32 6468.07,3266.56 ; 6439.49,3402.32 6468.07,3266.56 ; 6439.49,3402.32 6468.07,3266.56 ; 6439.49,3402.32 6468.07,3266.56 ; 6439.49,3402.32 6468.07,3266.56 ; 6439.49,3402.32 6468.07,3266.56 ; 6439.49,3402.32 6468.07,3266.56 ; 6439.49,3402.32 6468.07,3266.56 ; 6439.49,3402.32 6468.07,3266.56 ; 6439.49,3402.32 6468.07,3266.56 ; 6439.49,3402.32 6468.07,3266.56 ; 6439.49,3402.32 6468.07,3266.56 ; 6439.49,3402.32 6468.07,3266.56 ; 6439.49,3402.32 6468.07,3266.56 ; 6439.49,3402.32 6468.07,3266.56 ; 6439.49,3402.32 6468.07,3266.56 ; 6439.49,3402.32 6468.07,3266.56 ; 6439.49,3402.32 6468.07,3266.56 ; 6439.49,3402.32 6468.07,3266.56 ; 6439.49,3402.32 6468.07,3266.56 ; 6439.49,3402.32 6468.07,3266.56 ; 6439.49,3402.32 6468.07,3266.56 ; 6439.49,3402.32 6468.07,3266.56 ; 6439.49,3402.32 6468.07,3266.56 ; 6439.49,3402.32 6468.07,3266.56 ; 6439.49,3402.32 6468.07,3266.56 ; 6439.49,3402.32 6468.07,3266.56 ; 6439.49,3402.32 6468.07,3266.56 ; 6439.49,3402.32 6468.07,3266.56 ; 6439.49,3402.32 6468.07,3266.56 ; 6439.49,3402.32 6468.07,3266.56 ; 6439.49,3402.32 6468.07,3266.56 ; 6439.49,3402.32 6468.07,3266.56 ; 6439.49,3402.32 6468.07,3266.56 ; 6439.49,3402.32 6468.07,3266.56 ; 6439.49,3402.32 6468.07,3266.56 ; 6439.49,3402.32 6468.07,3266.56 ; 6439.49,3402.32 6468.07,3266.56 ; 6439.49,3402.32 6468.07,3266.56 ; 6439.49,3402.32 6468.07,3266.56 ; 6439.49,3402.32 6468.07,3266.56 ; 6439.49,3402.32 6468.07,3266.56 ; 6439.49,3402.32 6468.07,3266.56 ; 6468.07,3266.56 6468.07,3405.3 ; 6468.07,3266.56 6496.66,3402.32 ; 6468.07,3266.56 6516.05,3396.73 ; 6468.07,3266.56 6534.67,3388.27 ; 6468.07,3266.56 6468.07,3405.3 ; 6468.07,3266.56 6496.66,3402.32 ; 6468.07,3266.56 6516.05,3396.73 ; 6468.07,3266.56 6534.67,3388.27 ; 6468.07,3266.56 6468.07,3405.3 ; 6468.07,3266.56 6496.66,3402.32 ; 6468.07,3266.56 6516.05,3396.73 ; 6468.07,3266.56 6534.67,3388.27 ; 6468.07,3266.56 6468.07,3405.3 ; 6468.07,3266.56 6496.66,3402.32 ; 6468.07,3266.56 6516.05,3396.73 ; 6468.07,3266.56 6534.67,3388.27 ; 6468.07,3266.56 6468.07,3405.3 ; 6468.07,3266.56 6496.66,3402.32 ; 6468.07,3266.56 6516.05,3396.73 ; 6468.07,3266.56 6534.67,3388.27 ; 6468.07,3266.56 6468.07,3405.3 ; 6468.07,3266.56 6496.66,3402.32 ; 6468.07,3266.56 6516.05,3396.73 ; 6468.07,3266.56 6534.67,3388.27 ; 6468.07,3266.56 6468.07,3405.3 ; 6468.07,3266.56 6496.66,3402.32 ; 6468.07,3266.56 6516.05,3396.73 ; 6468.07,3266.56 6534.67,3388.27 ; 6468.07,3266.56 6468.07,3405.3 ; 6468.07,3266.56 6496.66,3402.32 ; 6468.07,3266.56 6516.05,3396.73 ; 6468.07,3266.56 6534.67,3388.27 ; 6468.07,3266.56 6468.07,3405.3 ; 6468.07,3266.56 6496.66,3402.32 ; 6468.07,3266.56 6516.05,3396.73 ; 6468.07,3266.56 6534.67,3388.27 ; 6468.07,3266.56 6468.07,3405.3 ; 6468.07,3266.56 6496.66,3402.32 ; 6468.07,3266.56 6516.05,3396.73 ; 6468.07,3266.56 6534.67,3388.27 ; 6468.07,3266.56 6468.07,3405.3 ; 6468.07,3266.56 6496.66,3402.32 ; 6468.07,3266.56 6516.05,3396.73 ; 6468.07,3266.56 6534.67,3388.27 ; 6468.07,3266.56 6468.07,3405.3 ; 6468.07,3266.56 6496.66,3402.32 ; 6468.07,3266.56 6516.05,3396.73 ; 6468.07,3266.56 6534.67,3388.27 ; 6468.07,3266.56 6468.07,3405.3 ; 6468.07,3266.56 6496.66,3402.32 ; 6468.07,3266.56 6516.05,3396.73 ; 6468.07,3266.56 6534.67,3388.27 ; 6468.07,3266.56 6468.07,3405.3 ; 6468.07,3266.56 6496.66,3402.32 ; 6468.07,3266.56 6516.05,3396.73 ; 6468.07,3266.56 6534.67,3388.27 ; 6468.07,3266.56 6468.07,3405.3 ; 6468.07,3266.56 6496.66,3402.32 ; 6468.07,3266.56 6516.05,3396.73 ; 6468.07,3266.56 6534.67,3388.27 ; 6468.07,3266.56 6468.07,3405.3 ; 6468.07,3266.56 6496.66,3402.32 ; 6468.07,3266.56 6516.05,3396.73 ; 6468.07,3266.56 6534.67,3388.27 ; 6468.07,3266.56 6468.07,3405.3 ; 6468.07,3266.56 6496.66,3402.32 ; 6468.07,3266.56 6516.05,3396.73 ; 6468.07,3266.56 6534.67,3388.27 ; 6468.07,3266.56 6468.07,3405.3 ; 6468.07,3266.56 6496.66,3402.32 ; 6468.07,3266.56 6516.05,3396.73 ; 6468.07,3266.56 6534.67,3388.27 ; 6468.07,3266.56 6468.07,3405.3 ; 6468.07,3266.56 6496.66,3402.32 ; 6468.07,3266.56 6516.05,3396.73 ; 6468.07,3266.56 6534.67,3388.27 ; 6468.07,3266.56 6468.07,3405.3 ; 6468.07,3266.56 6496.66,3402.32 ; 6468.07,3266.56 6516.05,3396.73 ; 6468.07,3266.56 6534.67,3388.27 ; 6468.07,3266.56 6468.07,3405.3 ; 6468.07,3266.56 6496.66,3402.32 ; 6468.07,3266.56 6516.05,3396.73 ; 6468.07,3266.56 6534.67,3388.27 ; 6468.07,3266.56 6468.07,3405.3 ; 6468.07,3266.56 6496.66,3402.32 ; 6468.07,3266.56 6516.05,3396.73 ; 6468.07,3266.56 6534.67,3388.27 ; 6468.07,3266.56 6468.07,3405.3 ; 6468.07,3266.56 6496.66,3402.32 ; 6468.07,3266.56 6516.05,3396.73 ; 6468.07,3266.56 6534.67,3388.27 ; 6468.07,3266.56 6468.07,3405.3 ; 6468.07,3266.56 6496.66,3402.32 ; 6468.07,3266.56 6516.05,3396.73 ; 6468.07,3266.56 6534.67,3388.27 ; 6468.07,3266.56 6468.07,3405.3 ; 6468.07,3266.56 6496.66,3402.32 ; 6468.07,3266.56 6516.05,3396.73 ; 6468.07,3266.56 6534.67,3388.27 ; 6468.07,3266.56 6468.07,3405.3 ; 6468.07,3266.56 6496.66,3402.32 ; 6468.07,3266.56 6516.05,3396.73 ; 6468.07,3266.56 6534.67,3388.27 ; 6468.07,3266.56 6468.07,3405.3 ; 6468.07,3266.56 6496.66,3402.32 ; 6468.07,3266.56 6516.05,3396.73 ; 6468.07,3266.56 6534.67,3388.27 ; 6468.07,3266.56 6468.07,3405.3 ; 6468.07,3266.56 6496.66,3402.32 ; 6468.07,3266.56 6516.05,3396.73 ; 6468.07,3266.56 6534.67,3388.27 ; 6468.07,3266.56 6468.07,3405.3 ; 6468.07,3266.56 6496.66,3402.32 ; 6468.07,3266.56 6516.05,3396.73 ; 6468.07,3266.56 6534.67,3388.27 ; 6468.07,3266.56 6468.07,3405.3 ; 6468.07,3266.56 6496.66,3402.32 ; 6468.07,3266.56 6516.05,3396.73 ; 6468.07,3266.56 6534.67,3388.27 ; 6468.07,3266.56 6468.07,3405.3 ; 6468.07,3266.56 6496.66,3402.32 ; 6468.07,3266.56 6516.05,3396.73 ; 6468.07,3266.56 6534.67,3388.27 ; 6468.07,3266.56 6468.07,3405.3 ; 6468.07,3266.56 6496.66,3402.32 ; 6468.07,3266.56 6516.05,3396.73 ; 6468.07,3266.56 6534.67,3388.27 ; 6468.07,3266.56 6468.07,3405.3 ; 6468.07,3266.56 6496.66,3402.32 ; 6468.07,3266.56 6516.05,3396.73 ; 6468.07,3266.56 6534.67,3388.27 ; 6468.07,3266.56 6468.07,3405.3 ; 6468.07,3266.56 6496.66,3402.32 ; 6468.07,3266.56 6516.05,3396.73 ; 6468.07,3266.56 6534.67,3388.27 ; 6468.07,3266.56 6468.07,3405.3 ; 6468.07,3266.56 6496.66,3402.32 ; 6468.07,3266.56 6516.05,3396.73 ; 6468.07,3266.56 6534.67,3388.27 ; 6468.07,3266.56 6468.07,3405.3 ; 6468.07,3266.56 6496.66,3402.32 ; 6468.07,3266.56 6516.05,3396.73 ; 6468.07,3266.56 6534.67,3388.27 ; 6468.07,3266.56 6468.07,3405.3 ; 6468.07,3266.56 6496.66,3402.32 ; 6468.07,3266.56 6516.05,3396.73 ; 6468.07,3266.56 6534.67,3388.27 ; 6468.07,3266.56 6468.07,3405.3 ; 6468.07,3266.56 6496.66,3402.32 ; 6468.07,3266.56 6516.05,3396.73 ; 6468.07,3266.56 6534.67,3388.27 ; 6468.07,3266.56 6468.07,3405.3 ; 6468.07,3266.56 6496.66,3402.32 ; 6468.07,3266.56 6516.05,3396.73 ; 6468.07,3266.56 6534.67,3388.27 ; 6468.07,3266.56 6468.07,3405.3 ; 6468.07,3266.56 6496.66,3402.32 ; 6468.07,3266.56 6516.05,3396.73 ; 6468.07,3266.56 6534.67,3388.27 ; 6468.07,3266.56 6468.07,3405.3 ; 6468.07,3266.56 6496.66,3402.32 ; 6468.07,3266.56 6516.05,3396.73 ; 6468.07,3266.56 6534.67,3388.27 ; 6468.07,3266.56 6468.07,3405.3 ; 6468.07,3266.56 6496.66,3402.32 ; 6468.07,3266.56 6516.05,3396.73 ; 6468.07,3266.56 6534.67,3388.27 ; 6468.07,3266.56 6468.07,3405.3 ; 6468.07,3266.56 6496.66,3402.32 ; 6468.07,3266.56 6516.05,3396.73 ; 6468.07,3266.56 6534.67,3388.27 ; 6468.07,3266.56 6468.07,3405.3 ; 6468.07,3266.56 6496.66,3402.32 ; 6468.07,3266.56 6516.05,3396.73 ; 6468.07,3266.56 6534.67,3388.27 ; 6468.07,3266.56 6468.07,3405.3 ; 6468.07,3266.56 6496.66,3402.32 ; 6468.07,3266.56 6516.05,3396.73 ; 6468.07,3266.56 6534.67,3388.27 ; 6468.07,3266.56 6468.07,3405.3 ; 6468.07,3266.56 6496.66,3402.32 ; 6468.07,3266.56 6516.05,3396.73 ; 6468.07,3266.56 6534.67,3388.27 ; 6468.07,3266.56 6468.07,3405.3 ; 6468.07,3266.56 6496.66,3402.32 ; 6468.07,3266.56 6516.05,3396.73 ; 6468.07,3266.56 6534.67,3388.27 ; 6468.07,3266.56 6468.07,3405.3 ; 6468.07,3266.56 6496.66,3402.32 ; 6468.07,3266.56 6516.05,3396.73 ; 6468.07,3266.56 6534.67,3388.27 ; 6468.07,3266.56 6468.07,3405.3 ; 6468.07,3266.56 6496.66,3402.32 ; 6468.07,3266.56 6516.05,3396.73 ; 6468.07,3266.56 6534.67,3388.27 ; 6468.07,3266.56 6468.07,3405.3 ; 6468.07,3266.56 6496.66,3402.32 ; 6468.07,3266.56 6516.05,3396.73 ; 6468.07,3266.56 6534.67,3388.27 ; 6468.07,3266.56 6468.07,3405.3 ; 6468.07,3266.56 6496.66,3402.32 ; 6468.07,3266.56 6516.05,3396.73 ; 6468.07,3266.56 6534.67,3388.27 ; 6468.07,3266.56 6468.07,3405.3 ; 6468.07,3266.56 6496.66,3402.32 ; 6468.07,3266.56 6516.05,3396.73 ; 6468.07,3266.56 6534.67,3388.27 ; 6468.07,3266.56 6468.07,3405.3 ; 6468.07,3266.56 6496.66,3402.32 ; 6468.07,3266.56 6516.05,3396.73 ; 6468.07,3266.56 6534.67,3388.27 ; 6468.07,3266.56 6468.07,3405.3 ; 6468.07,3266.56 6496.66,3402.32 ; 6468.07,3266.56 6516.05,3396.73 ; 6468.07,3266.56 6534.67,3388.27 ; 6468.07,3266.56 6468.07,3405.3 ; 6468.07,3266.56 6496.66,3402.32 ; 6468.07,3266.56 6516.05,3396.73 ; 6468.07,3266.56 6534.67,3388.27 ; 6468.07,3266.56 6468.07,3405.3 ; 6468.07,3266.56 6496.66,3402.32 ; 6468.07,3266.56 6516.05,3396.73 ; 6468.07,3266.56 6534.67,3388.27 ; 6468.07,3266.56 6468.07,3405.3 ; 6468.07,3266.56 6496.66,3402.32 ; 6468.07,3266.56 6516.05,3396.73 ; 6468.07,3266.56 6534.67,3388.27 ; 6468.07,3266.56 6468.07,3405.3 ; 6468.07,3266.56 6496.66,3402.32 ; 6468.07,3266.56 6516.05,3396.73 ; 6468.07,3266.56 6534.67,3388.27 ; 6468.07,3266.56 6468.07,3405.3 ; 6468.07,3266.56 6496.66,3402.32 ; 6468.07,3266.56 6516.05,3396.73 ; 6468.07,3266.56 6534.67,3388.27 ; 6468.07,3266.56 6468.07,3405.3 ; 6468.07,3266.56 6496.66,3402.32 ; 6468.07,3266.56 6516.05,3396.73 ; 6468.07,3266.56 6534.67,3388.27 ; 6468.07,3266.56 6468.07,3405.3 ; 6468.07,3266.56 6496.66,3402.32 ; 6468.07,3266.56 6516.05,3396.73 ; 6468.07,3266.56 6534.67,3388.27 ; 6468.07,3266.56 6468.07,3405.3 ; 6468.07,3266.56 6496.66,3402.32 ; 6468.07,3266.56 6516.05,3396.73 ; 6468.07,3266.56 6534.67,3388.27 ; 6468.07,3266.56 6468.07,3405.3 ; 6468.07,3266.56 6496.66,3402.32 ; 6468.07,3266.56 6516.05,3396.73 ; 6468.07,3266.56 6534.67,3388.27 ; 6468.07,3266.56 6468.07,3405.3 ; 6468.07,3266.56 6496.66,3402.32 ; 6468.07,3266.56 6516.05,3396.73 ; 6468.07,3266.56 6534.67,3388.27 ; 6468.07,3266.56 6468.07,3405.3 ; 6468.07,3266.56 6496.66,3402.32 ; 6468.07,3266.56 6516.05,3396.73 ; 6468.07,3266.56 6534.67,3388.27 ; 6468.07,3266.56 6534.67,3388.27 ; 6468.07,3266.56 6516.05,3396.73 ; 6468.07,3266.56 6496.66,3402.32 ; 6468.07,3266.56 6468.07,3405.3 ; 6468.07,3266.56 6534.67,3388.27 ; 6468.07,3266.56 6516.05,3396.73 ; 6468.07,3266.56 6496.66,3402.32 ; 6468.07,3266.56 6468.07,3405.3 ; 6468.07,3266.56 6534.67,3388.27 ; 6468.07,3266.56 6516.05,3396.73 ; 6468.07,3266.56 6496.66,3402.32 ; 6468.07,3266.56 6468.07,3405.3 ; 6468.07,3266.56 6534.67,3388.27 ; 6468.07,3266.56 6516.05,3396.73 ; 6468.07,3266.56 6496.66,3402.32 ; 6468.07,3266.56 6468.07,3405.3 ; 6468.07,3266.56 6534.67,3388.27 ; 6468.07,3266.56 6516.05,3396.73 ; 6468.07,3266.56 6496.66,3402.32 ; 6468.07,3266.56 6468.07,3405.3 ; 6468.07,3266.56 6534.67,3388.27 ; 6468.07,3266.56 6516.05,3396.73 ; 6468.07,3266.56 6496.66,3402.32 ; 6468.07,3266.56 6468.07,3405.3 ; 6468.07,3266.56 6534.67,3388.27 ; 6468.07,3266.56 6516.05,3396.73 ; 6468.07,3266.56 6496.66,3402.32 ; 6468.07,3266.56 6468.07,3405.3 ; 6468.07,3266.56 6534.67,3388.27 ; 6468.07,3266.56 6516.05,3396.73 ; 6468.07,3266.56 6496.66,3402.32 ; 6468.07,3266.56 6468.07,3405.3
  Top Layer w30: v1(4500.63,2939.37) v1(4500.63,2995.63) 4500.63,3135 ; 4500.63,3015.47 4500.63,3129.09 ; 4503.51,3394.46 4579.37,3242.59 ; v1(4504.37,2614.37) v1(4570.63,2614.37) 4720,2614.37 ; v1(4509.37,2535.63) v1(4584.37,2535.63) ; 4519.99,3361.46 v1(4579.37,3265) ; 4531.7,3405.52 4579.37,3242.59 ; 4542.33,3369.19 v1(4579.37,3265) ; 4564.86,3411.73 4579.37,3242.59 ; 4564.86,3451.1 4579.37,3436.59 4579.37,3135 v1(4579.37,2995.63) v1(4579.37,2940.63) ; 4568.14,3373.56 v1(4579.37,3265) ; 4579.37,3015.47 4579.37,3129.09 ; 4579.37,3140.91 v1@4579.37,3254.53 ; 4579.37,3156 v1(4579.37,3265) ; 4594.27,3373.25 v1(4579.37,3265) ; 4598.6,3411.26 4579.37,3242.59 ; 4600.47,2535.63 4714.09,2535.63 ; 4600.47,2614.37 4714.09,2614.37 ; 4617.41,3369.07 v1(4579.37,3265) ; 4628.26,3405.16 4579.37,3242.59 ; 4693.37,2535.63 v1(4584.37,2535.63) ; v1(4753.39,2933.39) 5090.45,2933.39 ; v1(4830,2535.63) 4725.91,2535.63 v1@4839.53,2535.63 ; 5039.02,2601.25 4883.5,2535.63 ; 5039.04,2870.79 4882.34,2933.39 ; 5039.04,2995.98 4882.34,2933.39 ; 5041.44,2476.08 4883.5,2535.63 ; 5047.71,2899.81 4882.34,2933.39 ; 5047.71,2966.96 4882.34,2933.39 ; 5048.24,2572.4 4883.5,2535.63 ; 5049.54,2505.27 4883.5,2535.63 ; 5051.08,2933.39 4882.34,2933.39 ; 5052.26,2538.9 4883.5,2535.63 ; 5091.63,2538.9 5088.37,2535.63 4720,2535.63 v1(4584.37,2535.63) ; 5753.9,2919.86 5798.13,2875.63 6190,2875.63 ; 5761.77,2526.56 v1(5963.44,2526.56) ; 5788.11,2886.52 5968.74,2875.63 ; 5788.82,2856.28 5968.74,2875.63 ; 5793.27,2919.86 5968.74,2875.63 ; 5801.14,2526.56 v1(5963.44,2526.56) ; 5804.53,2951.67 5968.74,2875.63 ; 5804.65,2493 v1(5963.44,2526.56) ; 5804.65,2560.11 v1(5963.44,2526.56) ; 5813.66,2464.06 v1(5963.44,2526.56) ; 5813.66,2589.05 v1(5963.44,2526.56) ; 5819.49,2977.96 5968.74,2875.63 ; 5881.06,2866.2 v1(5990,2875.63) ; 5881.06,2880.92 v1(5990,2875.63) ; 5882.07,2897.48 v1(5990,2875.63) ; 5884.81,2914.49 v1(5990,2875.63) ; 5889.23,2930.15 v1(5990,2875.63) ; v1(6070,2875.63) 6179,2875.63 ; v1@6070.47,2875.63 6184.09,2875.63 ; v1(6116.56,2526.56) v1(6041.56,2526.56) v1(5963.44,2526.56) ; 6190,2954.37 v1(6299.37,2954.37) ; 6195.91,2954.37 v1(6299.37,2954.37) ; 6209.02,3394.04 6271.61,3237.34 ; 6238.04,3402.71 6271.61,3237.34 ; v1(6271.61,3068.39) v1(6271.61,3133.39) v1(6271.61,3203.39) 6271.61,3445.45 ; 6271.61,3406.08 6271.61,3237.34 ; 6305.19,3402.71 6271.61,3237.34 ; 6334.21,3394.04 6271.61,3237.34 ; v1(6370.63,2954.37) v1(6299.37,2954.37) ; v1(6590.63,2919.37) v1(6590.63,2979.37) ; 6590.63,3089.09 v1(6590.63,2979.37) ; 6590.63,3095 v1(6590.63,2979.37) ; 6603.75,3394.02 v1@6669.37,3238.5 ; 6625.82,3341.73 v1(6669.37,3240) ; 6632.6,3403.24 v1@6669.37,3238.5 ; 6645.2,3346.78 v1(6669.37,3240) ; 6666.1,3407.26 v1@6669.37,3238.5 ; 6666.1,3446.63 6669.37,3443.37 ; 6667.23,3348.98 v1(6669.37,3240) ; v1(6669.37,2885.63) v1(6669.37,2985) ; 6669.37,3089.09 v1(6669.37,2985) ; 6669.37,3100.91 6669.37,3214.53 ; 6689.3,3347.49 v1(6669.37,3240) ; 6689.37,3423.37 6669.37,3443.37 ; 6699.73,3404.54 v1@6669.37,3238.5 ; 6708.79,3343.05 v1(6669.37,3240) ; 6728.92,3396.44 v1@6669.37,3238.5 ; v1(4579.37,3215) 4604.14,3324.97 v1(4579.37,3265) ; v1(4579.37,3215) 4579.37,3242.59 ; v1(4579.37,3215) 4579.37,3242.59 ; v1(4579.37,3215) 4533.89,3333.63 v1(4579.37,3265) ; v1(4579.37,3215) 4588.7,3324.41 v1(4579.37,3265) ; v1(4579.37,3215) 4579.37,3242.59 ; v1(4579.37,3215) 4579.37,3242.59 ; v1(4579.37,3215) 4551.34,3338.4 v1(4579.37,3265) ; v1(4579.37,3215) 4579.37,3242.59 ; v1(4579.37,3215) 4570.93,3340.94 v1(4579.37,3265) ; v1(4579.37,3215) v1(4579.37,3265) ; v1(4579.37,3215) v1(4579.37,3265) ; v1(4579.37,3215) v1(4579.37,3265) ; v1(4579.37,3215) v1(4579.37,3265) ; v1(4579.37,3215) v1(4579.37,3265) ; 4579.37,3242.59 v1(4579.37,3265) ; 4579.37,3242.59 v1(4579.37,3265) ; 4579.37,3242.59 v1(4579.37,3265) ; 4579.37,3242.59 v1(4579.37,3265) ; 4579.37,3242.59 v1(4579.37,3265) ; 5968.74,2875.63 v1(5990,2875.63) ; 5968.74,2875.63 v1(5990,2875.63) ; 5968.74,2875.63 v1(5990,2875.63) ; 5968.74,2875.63 v1(5990,2875.63) ; 5968.74,2875.63 v1(5990,2875.63) ; v1(6669.37,2985) 6669.37,3095 v1(6669.37,3240) ; v1(6669.37,3240) 6669.37,3443.37
  Bottom Layer w20: 4222.99,2632.77 v2(4235,2550) 4222.99,2562.01 4222.99,2657.76 ; 4222.99,2736.5 4224.49,2735 v2(4630,2735) ; 4222.99,2815.24 4365.24,2815.24 4405,2855 v2(4405,3020) ; v2(6305,2655) 6646.77,2655 6647.01,2654.76 ; 6468.07,2868.07 v2(6468.07,2943.07) 6468.07,2781.93 6516.5,2733.5 6647.01,2733.5 ; 6647.01,2812.24 6669.37,2834.61 v1(6669.37,2885.63) ; 4257.99,2736.5 4328.01,2735 ; 4257.99,2736.5 4328,2735 ; 4257.99,2736.5 4328.01,2735 ; 4257.99,2815.24 4327.99,2815.24 ; 4257.99,2815.24 4327.99,2815.24 ; 4257.99,2815.24 4327.99,2815.24 ; 6542.01,2655 6612.01,2654.76 ; 6542.01,2655 6612.01,2654.76 ; 6542.01,2655 6612.01,2654.76 ; 6542.01,2655 6612.01,2654.76 ; 6542.01,2655 6612.01,2654.76 ; 6542.01,2655 6612.01,2654.76 ; 6542.01,2655 6612.01,2654.76 ; 6542.01,2733.5 6612.01,2733.5 ; 6542.01,2733.5 6612.01,2733.5 ; 6542.01,2733.5 6612.01,2733.5 ; 6542.01,2733.5 6612.01,2733.5 ; 6542.01,2733.5 6612.01,2733.5 ; 6542.01,2733.5 6612.01,2733.5 ; 6542.01,2733.5 6612.01,2733.5
  other v1: 4825,2933.39 4171.56,3226.56

## Polygon pours and split planes (outlines as drawn)
no net on Top Layer "Bottom Layer-No Net" (solid, remove dead copper): 3790,3735 3790,2140 5380,2140 5385,2135 5385,3735
no net on Top Layer "Bottom Layer-No Net" (solid, remove dead copper): 5470,3745 5470,2155 5480,2145 5485,2140 7065,2140 7065,3735 7060,3740
no net on Bottom Layer "Bottom Layer-No Net" (solid, remove dead copper): 3790,3735 3790,2140 5385,2140 5385,3735
no net on Bottom Layer "Bottom Layer-No Net" (solid, remove dead copper): 5470,3740 5470,2145 7060,2145 7065,2140 7065,3740

## Keep-outs
Keep-Out Layer:
  lines w5.91: 5020,3060 5220,3060 ; 5030,3060 cw(c5025,3105) 4980,3100 4980,3270 ccw(c4935,3265) 4930,3310 4780,3310 cw(c4775,3355) 4730,3350 4730,3570 ccw(c4685,3565) 4680,3610 4055,3610 ccw(c4060,3565) 4015,3560 4015,3360 cw(c3970,3355) 3975,3310 3830,3310 ccw(c3835,3265) 3790,3260 3790,2180 ccw(c3835,2185) 3840,2140 4940,2140 ccw(c4935,2185) 4980,2190 4980,2330 cw(c5025,2335) 5020,2380 5220,2380 ccw(c5215,2425) 5260,2430 ; 5210,3060 cw(c5215,3015) 5260,3020 5260,2420 ; 6130,3380 6130,3580 ; 6130,3390 cw(c6085,3385) 6090,3340 5920,3340 ccw(c5925,3295) 5880,3290 5880,3140 cw(c5835,3135) 5840,3090 5620,3090 ccw(c5625,3045) 5580,3040 5580,2415 ccw(c5625,2420) 5630,2375 5830,2375 cw(c5835,2330) 5880,2335 5880,2190 ccw(c5925,2195) 5930,2150 7010,2150 ccw(c7005,2195) 7050,2200 7050,3300 ccw(c7005,3295) 7000,3340 6860,3340 cw(c6855,3385) 6810,3380 6810,3580 ccw(c6765,3575) 6760,3620 ; 6130,3570 cw(c6175,3575) 6170,3620 6770,3620